# Altium PCB ALCT_MEZ_LX150T.PcbDoc (part 6 of 9)
Units mil, origin at the board's own origin, x right, y up, seen from the top; angles counter-clockwise.
Board outline 4101.98 x 5875.01 mil, 12 copper layers (Top Layer, Mid-Layer 1, +3V3, Mid-Layer 2, +1V2, Mid-Layer 4, +2V5, Mid-Layer 5, GND1, Mid-Layer 7, GND2, Bottom Layer), stack 64.7 mil thick; 378 components, 616 nets, 2492 pads, 1686 vias.
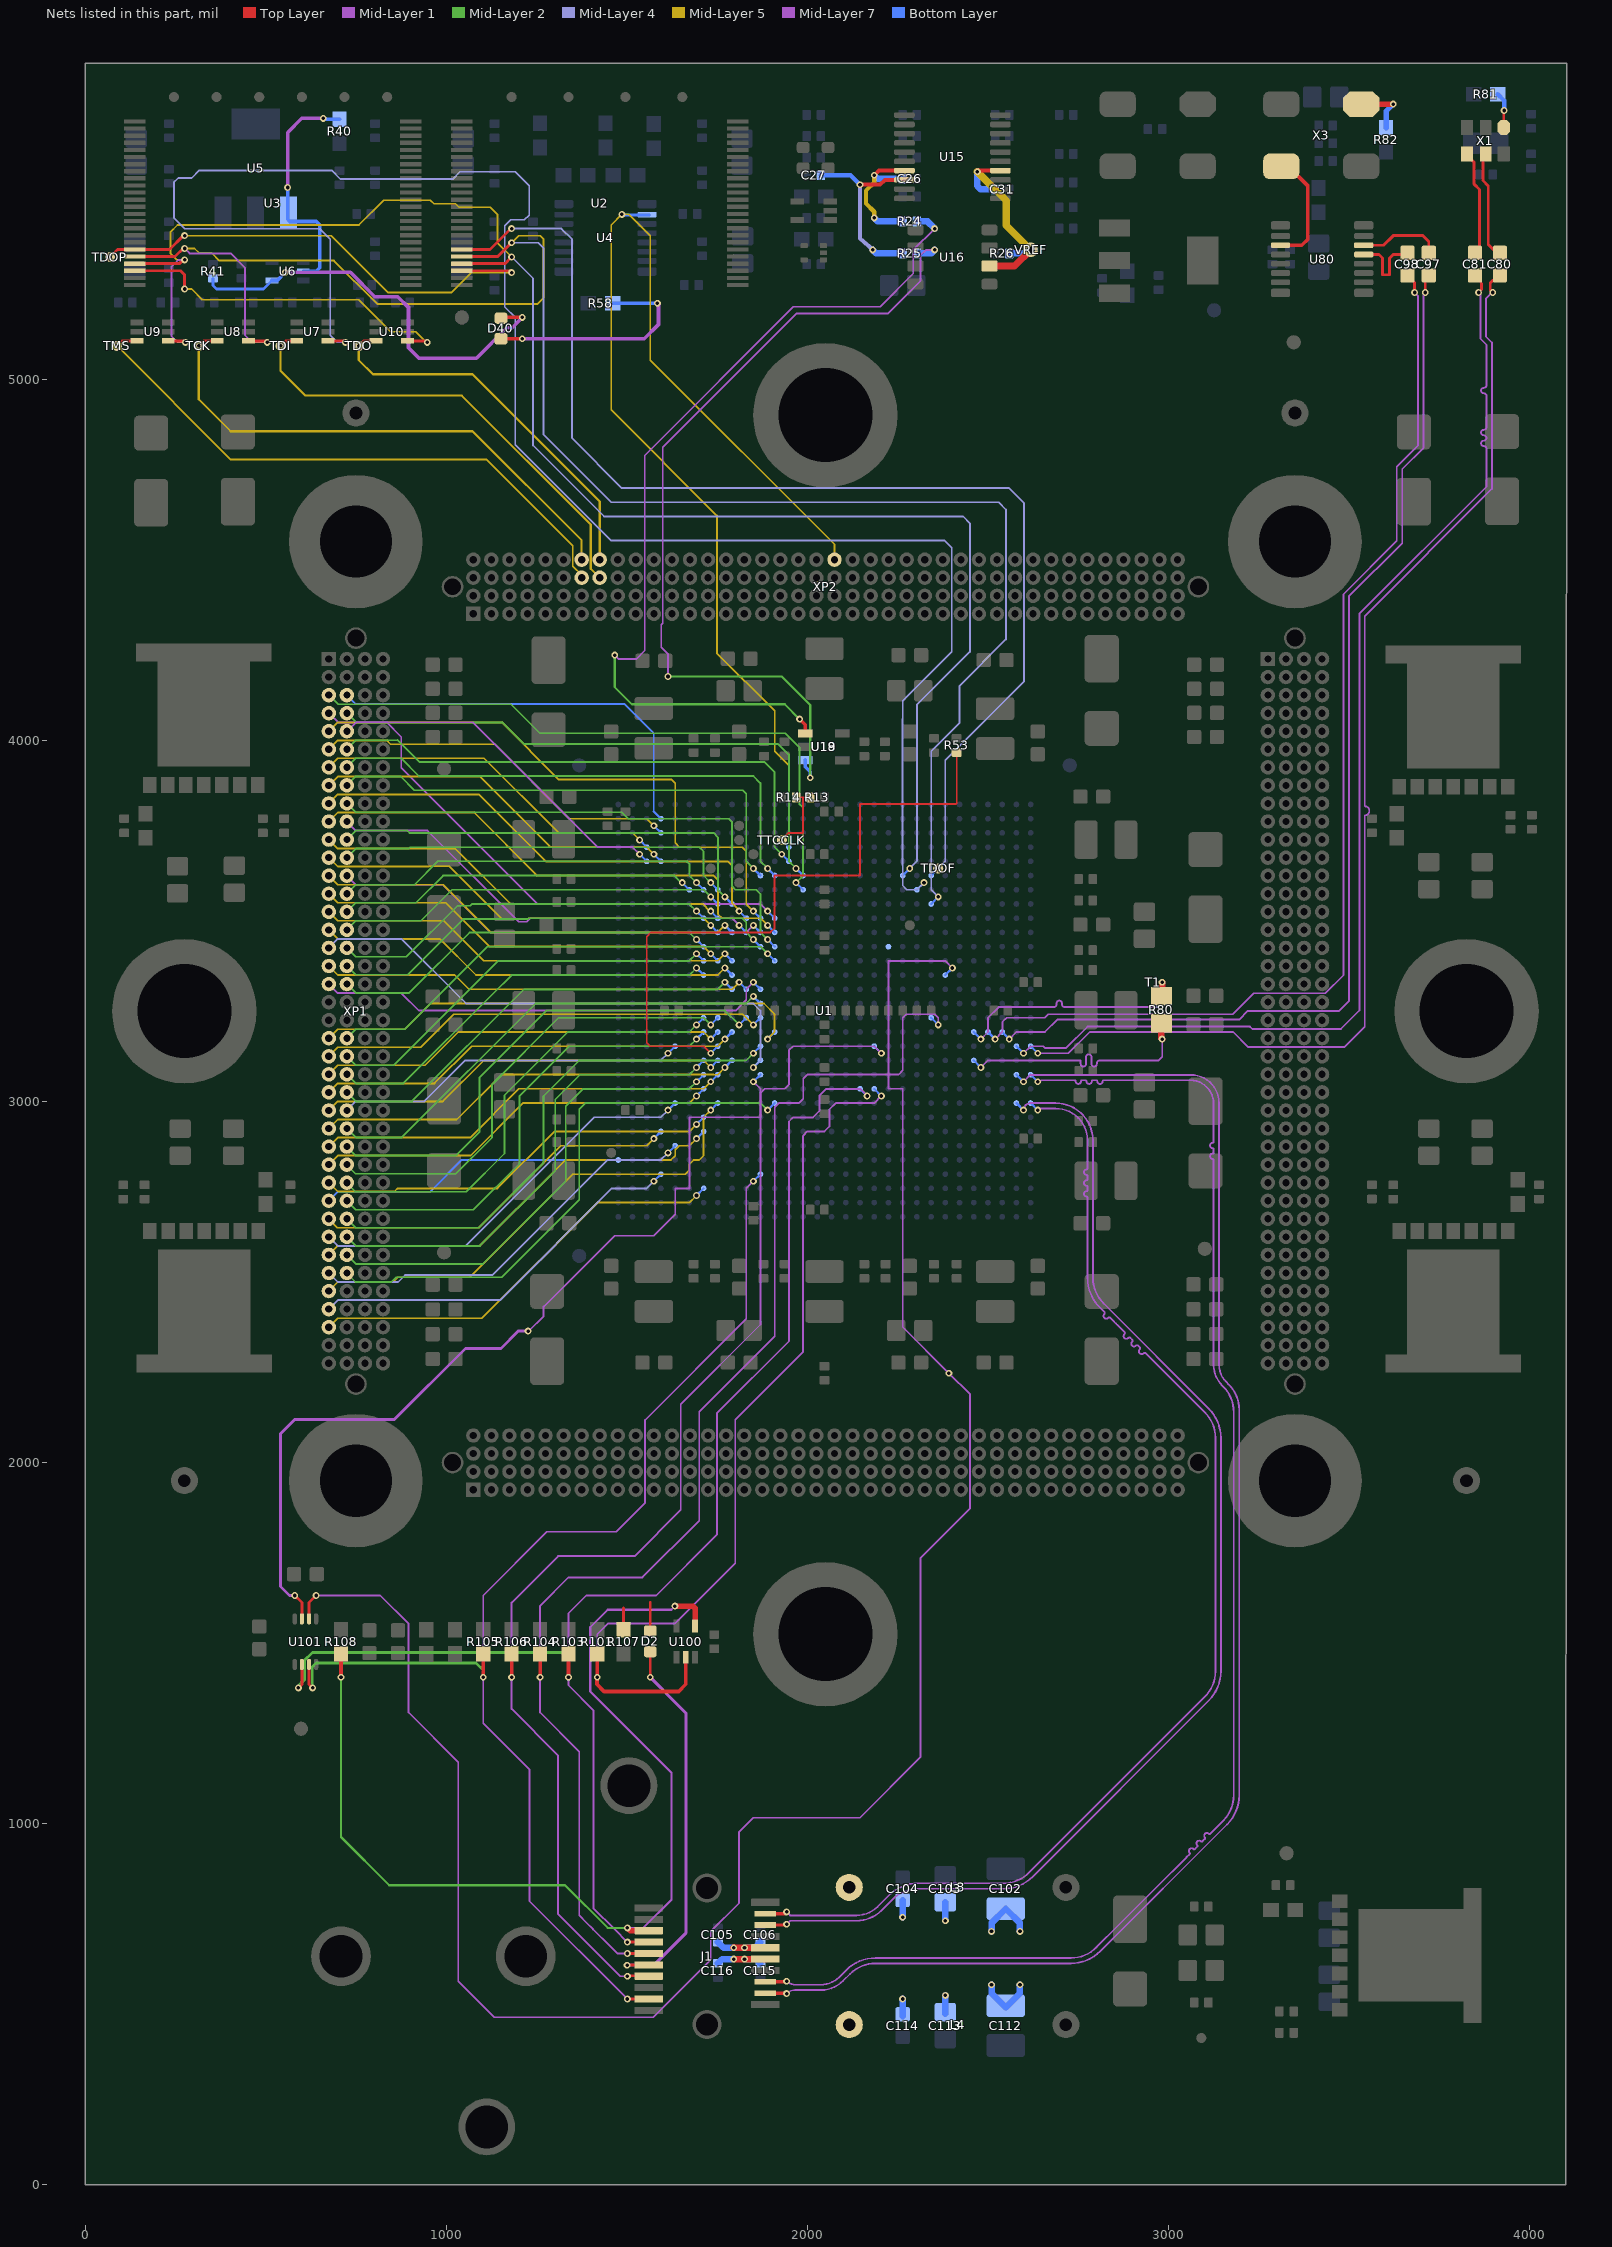
[diagram p15: the nets of this part, all layers, seen from the top]

## Via types
v1: diameter 19, hole 10, Top Layer to Bottom Layer, tented both sides, 1667 vias
v2: diameter 40, hole 20, Top Layer to Bottom Layer, 12 vias
v3: diameter 19, hole 10, Top Layer to Bottom Layer, 7 vias

## Nets (pads, with @x,y where several pads share a name; then routed paths per layer and width w, separated by ;. In a path a pad name is that pad's centre, name@x,y a point inside that pad or via, vN(x,y) a via of type N, cw(c..) or ccw(c..) an arc to the next point about the centre after c; other vN are vias at no path point) (continued)
MEZ_CLOCK: R13.2 R14.1 TTCCLK.1 U1.V27 U4.2 XP2.D21 | length 3475.5
  Top Layer w5: v1(1929.14,3723.82) 1948.82,3743.49 1988.17,3743.49 ; R14.1@1968.5,3841.93 1988.19,3841.93 ; 1988.19,3743.51 1988.19,3841.93 ; R13.2@2007.87,3841.93 1988.19,3841.93
  Mid-Layer 5 w5: v1(1929.14,3723.82) 1948.65,3743.33 1948.65,3930.69 1909.45,3969.89 1909.45,4081.13 1749.5,4241.08 1749.5,4621.96 1456.69,4914.77 1456.69,5426.58 v1(1486.22,5456.11) 1505.91,5456.11 1564.96,5397.05 1564.96,5052.56 2075,4542.53 XP2.D21@2075,4500.01
  Bottom Layer w6: v1(1929.14,3723.82) U1.V27@1948.82,3704.14
  Bottom Layer w8: v1@1488.18,5454.15 U4.2@1562.99,5454.15
mgt_refclk0_n: C80.2 U1.A13 | length 3244
  Top Layer w8: v1(3897.64,5239.57) 3890.61,5246.6 3890.61,5266.01 C80.2@3897.64,5273.04
  Mid-Layer 7 w5: v1(2637.8,3133.27) 2722.75,3133.27 2781.8,3192.33 3179.13,3192.33 3220.96,3150.51 3486.5,3150.51 3543.31,3207.31 3543.31,3768.71 3543.31,3792.13 ccw(c3543.31,3804.63) 3543.31,3817.13 3543.31,3842.13 3543.31,3867.13 3543.31,4343.9 3895.3,4695.89 3895.3,5101.25 3878.72,5117.83 3878.72,5222.99 v1@3895.3,5239.57
  Bottom Layer w6: U1.A13@2618.11,3152.96 v1(2637.8,3133.27)
mgt_refclk0_p: C81.2 U1.B13 | length 3264.7
  Top Layer w5: C81.2@3848.43,5282.88 3866.61,5264.69
  Top Layer w8: v1(3858.27,5239.57) 3866.61,5247.91 3866.61,5264.69
  Mid-Layer 7 w5: v1(2598.42,3133.27) 2618.11,3152.96 2652.8,3152.96 2657.48,3148.27 2716.54,3148.27 2775.59,3207.33 3225.18,3207.33 3232,3200.51 3477.08,3200.51 3528.31,3251.74 3528.31,4350.12 3880.3,4702.1 3880.3,4798.01 3880.3,4799.51 3880.3,4807.01 ccw(c3872.8,4807.01) 3872.8,4814.51 cw(c3872.8,4822.01) 3865.3,4822.01 cw(c3872.8,4822.01) 3872.8,4829.51 ccw(c3872.8,4837.01) 3880.3,4837.01 ccw(c3872.8,4837.01) 3872.8,4844.51 cw(c3872.8,4852.01) 3865.3,4852.01 cw(c3872.8,4852.01) 3872.8,4859.51 ccw(c3872.8,4867.01) 3880.3,4867.01 3880.3,4874.51 3880.3,4889.51 3880.3,4897.01 3880.3,4906.8 3880.3,4921.8 3880.3,4936.8 3880.3,4944.3 3880.3,4945.69 3880.3,4953.19 ccw(c3872.8,4953.19) 3872.8,4960.69 cw(c3872.8,4968.19) 3865.3,4968.19 cw(c3872.8,4968.19) 3872.8,4975.69 ccw(c3872.8,4983.19) 3880.3,4983.19 3880.3,4990.69 3880.3,5005.69 3880.3,5013.19 3880.3,5014.51 3880.3,5029.51 3880.3,5037.01 3880.3,5061.01 3880.3,5095.04 3863.72,5111.62 3863.72,5234.12 v1(3858.27,5239.57)
  Bottom Layer w6: U1.B13@2578.74,3152.96 v1(2598.42,3133.27)
mgt_refclk1_n: C97.2 U1.C14 | length 3112.6
  Top Layer w8: v1(3710.63,5239.57) 3710.63,5276.97 C97.2@3720.47,5286.82
  Mid-Layer 7 w5: v1(2559.05,3172.64) 2578.74,3192.33 2657.48,3192.33 2691.69,3226.54 3195.19,3226.54 3219.15,3250.51 3472.5,3250.51 3499.25,3277.26 3499.25,4398.27 3646.89,4545.91 3646.89,4751.08 3705.94,4810.13 3705.94,5007.01 3705.94,5072.25 3705.94,5108.01 3705.94,5234.89 v1(3710.63,5239.57)
  Bottom Layer w6: U1.C14@2539.37,3192.33 v1(2559.05,3172.64)
mgt_refclk1_p: C98.2 U1.D14 | length 3116.5
  Top Layer w8: C98.2@3661.42,5286.82 3681.1,5267.13 v1(3681.1,5239.57)
  Mid-Layer 7 w5: v1(2519.69,3172.65) 2540.06,3193.03 2540.06,3219.87 2551.89,3231.7 2657.48,3231.7 2667.32,3241.54 3178,3241.54 3235.96,3299.51 3434.15,3299.51 3484.25,3349.61 3484.25,4404.49 3631.89,4552.12 3631.89,4757.29 3690.94,4816.34 3690.94,5229.73 v1(3681.1,5239.57)
  Bottom Layer w6: U1.D14@2500,3192.31 v1@2519.67,3172.64
mgtavttrcal: R80.1 T1.1 U1.E14 | length 714.1
  Top Layer w18: R80.1@2982.28,3292.72 v1(2982.28,3330.12)
  Mid-Layer 7 w5: v1(2480.33,3172.63) 2500,3192.31 2500,3231.7 2529.53,3261.23 2618.11,3261.23 2637.78,3261.23 2645.28,3261.23 2660.28,3261.23 2667.32,3261.23 2674.82,3261.23 2682.32,3261.23 ccw(c2682.32,3268.73) 2689.82,3268.73 2689.82,3271.71 cw(c2697.32,3271.71) 2697.32,3279.21 cw(c2697.32,3271.71) 2704.82,3271.71 2704.82,3268.73 ccw(c2712.32,3268.73) 2712.32,3261.23 2789,3261.23 2974,3261.23 2974,3261.72 2982.28,3270.01 v1(2982.28,3330.12)
  Bottom Layer w6: U1.E14@2460.64,3192.32 v1(2480.33,3172.63)
mgtrref: R80.2 U1.E12 | length 728.5
  Top Layer w18: R80.2@2980.32,3215.95 2980.32,3174.61 v1(2982.28,3172.64)
  Mid-Layer 7 w5: v1(2480.33,3093.9) 2500.02,3113.59 2755,3113.59 cw(c2755,3112.09) 2756.5,3112.09 2756.5,3104.06 ccw(c2764,3104.06) 2764,3096.56 ccw(c2764,3104.06) 2771.5,3104.06 2771.5,3113.59 2771.5,3123.11 cw(c2779,3123.11) 2779,3130.61 cw(c2779,3123.11) 2786.5,3123.11 2786.5,3113.59 2786.5,3104.06 ccw(c2794,3104.06) 2794,3096.56 ccw(c2794,3104.06) 2801.5,3104.06 2801.5,3106.09 cw(c2809,3106.09) 2809,3113.59 2864.17,3113.59 ; 2850,3113.59 2864.17,3113.59 ; v1(2982.28,3172.64) 2982.28,3123.43 2972.44,3113.59 2864.17,3113.59
  Bottom Layer w6: U1.E12@2460.63,3113.59 v1(2480.33,3093.9)
mod_abs: D2.K J1.6 | length 1081.1
  Top Layer w8: v1(1500.98,608.47) 1501.97,609.45 J1.6@1559.45,609.45 ; J1.6@1560.63,609.45 J1.6@1559.45,609.45 ; J1.6@1560.63,610.64 J1.6@1559.45,609.45 ; v1(1564.96,1405.56) D2.K@1564.96,1476.58
  Mid-Layer 7 w8: v1(1500.98,608.47) 1574.8,608.47 1663.39,697.05 1663.39,1307.13 v1(1564.96,1405.56)
NetD2_A: D2.A R107.2 | length 138.8
  Top Layer w8: R107.2@1491.14,1537.6 1491.14,1597.64 ; D2.A@1564.96,1533.67 1564.96,1612.41
NetJ1_3: J1.3 R108.2 U100.4 | length 2833.9
  Top Layer w12: v1@708.66,1405.71 R108.2@708.66,1470.68
  Top Layer w15: v1(1501.58,711.82) 1509.45,703.94 J1.3@1560.63,703.94 ; v1@1633.86,1602.56 1683.07,1602.56 1688.98,1596.66 U100.4@1688.98,1547.45
  Mid-Layer 2 w6: v1(708.66,1405.56) 708.66,963.59 842.32,829.93 1328.74,829.93 1446.85,711.82 v1(1501.58,711.82)
  Mid-Layer 7 w6: v1(1501.58,711.82) 1545.28,711.82 1624.02,790.56 1624.02,1140.75 1398.61,1366.16 1398.61,1544.09 1447.24,1592.72 1623.23,1592.72 v1(1633.07,1602.56)
osc0_n: C80.1 X1.5 | length 309
  Top Layer w4: X1.5@3868.11,5610.74 3868.11,5613.59 X1.5@3877.95,5623.43
  Top Layer w8: X1.5@3870.18,5610.74 3870.18,5549.61 3885.19,5534.61 3885.19,5451.19 ; 3885.19,5456.11 3885.19,5451.19 ; 3890.11,5367.53 3885.19,5372.45 ; C80.1@3907.48,5345.87 3907.48,5350.16 3885.19,5372.45 ; 3885.19,5372.45 3885.19,5451.19
osc0_p: C81.1 X1.4 | length 312.1
  Top Layer w4: C81.1@3848.43,5345.87 C81.1@3858.27,5355.71
  Top Layer w8: X1.4@3826.38,5623.43 3826.38,5619.5 3846.18,5599.7 3846.18,5539.67 3861.19,5524.66 3861.19,5437.38 ; C81.1@3858.27,5355.71 C81.1@3861.19,5358.64 ; C81.1@3861.19,5362.51 3861.19,5437.38 ; 3861.19,5456.11 3861.19,5437.38
osc80_lvcmos: U80.3 X3.3 | length 326.6
  Top Layer w10: U80.3@3310.04,5370.48 3369.09,5370.48 3385.83,5387.21 3385.83,5534.85 3331.69,5588.98 X3.3@3312.01,5588.98
osc80_n: C98.1 U80.13 | length 223.8
  Top Layer w8: U80.13@3540.35,5344.89 3582.68,5344.89 3592.52,5335.04 3592.52,5288.79 3612.2,5288.79 3612.2,5335.04 3622.05,5344.89 3656.5,5344.89 C98.1@3661.42,5349.81
osc80_p: C97.1 U80.14 | length 229.1
  Top Layer w8: U80.14@3540.35,5370.48 3595.47,5370.48 3622.05,5397.05 3704.72,5397.05 3720.47,5381.3 C97.1@3720.47,5349.81
POR: R40.2 U5.2 U6.2 | length 663.6
  Mid-Layer 7 w10: v1(561.02,5530.52) 561.02,5682.48 600.39,5721.86 v1(659.45,5721.86)
  Bottom Layer w10: v1(561.02,5530.52) 561.02,5442.33 566.93,5436.42 639.76,5436.42 649.61,5426.58 649.61,5308.47 639.76,5298.63 U6.2@604.33,5298.63 ; v1(659.45,5721.86) 661.42,5719.89 R40.2@704.72,5719.89
POR_A: D40.A R58.2 | length 637
  Top Layer w10: D40.A@1151.57,5111.62 v1(1210.63,5111.61)
  Mid-Layer 1 w10: v1(1210.63,5111.61) 1548.48,5111.61 1587.86,5150.99 1587.86,5206.82 v3(1584.64,5210.04)
  Bottom Layer w10: R58.2@1460.63,5210.05 v3(1584.64,5210.04)
POR_K: D40.K R41.1 U6.4 | length 1173.7
  Top Layer w10: D40.K@1151.57,5168.71 1153.53,5170.67 v1(1210.62,5170.66)
  Mid-Layer 1 w10: v3@551.18,5298.63 v3(554.42,5295.39) 734.7,5295.39 802.33,5227.76 866.14,5227.76 895.67,5198.23 895.67,5086.94 924.54,5058.08 1083.58,5058.08 1167.99,5142.48 1182.45,5142.48 v1(1210.62,5170.66)
  Bottom Layer w8: R41.1@354.33,5278.94 354.33,5259.26 364.17,5249.41 494.09,5249.41 U6.4@517.72,5273.04
  Bottom Layer w10: U6.4@517.72,5273.04 532.07,5273.04 v3(554.42,5295.39)
RDWR_B: R53.1 U1.AC13 | length 1858.3
  Top Layer w5: v1(1732.29,3133.27) 1712.6,3152.96 1564.96,3152.96 1555.12,3162.8 1555.12,3456.13 1566.91,3467.92 1897.67,3467.92 1908.64,3478.89 1908.64,3625.4 2145.67,3625.4 2145.67,3823.63 2411.42,3823.63 2413.39,3825.6 R53.1@2413.39,3960.04
  Bottom Layer w6: v1(1732.29,3133.27) U1.AC13@1751.98,3152.95
sda1_3v3: U1.Y11 U101.7 | length 2544.6
  Top Layer w8: v1(580.71,1632.09) 600.39,1612.41 U101.7@600.39,1567.13
  Mid-Layer 1 w5: v3@1227.66,2362.9 1269.68,2404.93 1269.68,2431.8 1466.04,2628.15 1574.8,2628.15 1633.86,2687.2 1633.86,2759.26 1673.23,2759.26 1673.23,2956.11 1870.08,2956.11 1870.08,3034.85 v1(1850.39,3054.54)
  Mid-Layer 7 w8: v1(580.71,1632.09) 566.14,1632.09 541.34,1656.9 541.34,1701.78 541.34,2080.12 580.71,2119.49 856.3,2119.49 1053.15,2316.34 1151.57,2316.34 1199.19,2363.96 v3(1226.6,2363.96)
  Bottom Layer w6: v1(1850.39,3054.54) U1.Y11@1870.07,3074.23
sda2_3v3: U1.G18 U101.6 | length 5779.1
  Top Layer w8: U101.6@620.08,1567.13 620.08,1612.41 v1(639.76,1632.09)
  Mid-Layer 1 w5: v1(2391.73,2247.45) 2263.78,2375.4 2263.78,3034.85 2224.41,3034.85 2224.41,3388.48 2382.58,3388.48 v1(2401.58,3369.48)
  Mid-Layer 7 w5: v1(639.76,1632.09) 816.93,1632.09 895.67,1553.35 895.67,1308.08 1033.46,1170.28 1033.46,564.18 1133.17,464.47 1573.52,464.47 1732.28,623.23 1732.28,701.97 1811.02,780.71 1811.02,977.56 1850.39,1016.93 2145.67,1016.93 2312.99,1184.26 2312.99,1735.64 2450.5,1873.14 2450.5,2188.68 v1(2391.73,2247.45)
  Bottom Layer w6: U1.G18@2381.89,3349.81 v1(2401.58,3369.48)
sfp_disable: R101.2 U1.M10 U100.2 | length 2574.2
  Top Layer w10: R101.2@1418.11,1460.67 v1(1418.11,1405.56) 1417.32,1404.77 1417.32,1386.03 1437.01,1366.34 1643.7,1366.34 1663.39,1386.03 U100.2@1663.39,1460.83
  Mid-Layer 7 w5: v1(1418.11,1405.56) 1418.11,1525.01 1447.24,1554.14 1633.07,1554.14 1800.5,1721.57 1800.5,2118.81 1988.19,2306.5 1988.19,2904.94 2000.17,2916.92 2047.42,2916.92 2061.23,2930.72 2061.23,2977.96 2078.56,2995.29 2184.87,2995.29 v1(2204.73,3015.15)
  Bottom Layer w6: U1.M10@2185.04,3034.85 v1(2204.73,3015.15)
sfp_i2c_scl: J1.5 R104.2 U1.H15 | length 3718.4
  Top Layer w8: v1(1501.57,640.95) 1559.45,640.95 J1.5@1560.63,642.13
  Top Layer w10: v1(1259.84,1405.56) R104.2@1259.84,1460.67
  Mid-Layer 7 w5: 1406.69,707.68 1387.8,726.58 ; v1(1501.57,640.95) 1473.43,640.95 1387.8,726.58 ; v1(2362.21,3212) 2362.21,3231.69 2352.36,3241.54 2273.62,3241.54 2263.98,3231.9 2263.98,3086.21 2252.17,3074.4 2000.17,3074.4 1988.38,3062.61 1988.38,3007.44 1976.22,2995.28 1921.07,2995.28 1909.45,2983.67 1909.45,2349.79 1700.5,2140.84 1700.5,1839.57 1543.02,1682.09 1338.58,1682.09 1259.84,1603.35 1259.84,1582.88 v1(1259.84,1405.56) 1259.84,1308.08 1368.11,1199.81 1368.11,746.27 1387.8,726.58
  Bottom Layer w6: U1.H15@2342.52,3231.7 v1(2362.21,3212)
sfp_i2c_scl2: J1.7 R106.2 U1.M13 | length 3594.5
  Top Layer w8: v1(1501.57,577.96) 1502.76,579.14 1560.63,579.14 J1.7@1559.45,577.96
  Top Layer w10: v1(1181.1,1405.56) R106.2@1181.1,1460.67
  Mid-Layer 7 w5: v1(1501.57,577.96) 1482.28,577.96 1309.06,751.19 1309.06,1189.97 1181.1,1317.92 v1(1181.1,1405.56) 1181.1,1612.41 1309.84,1741.15 1521.55,1741.15 1649.5,1869.1 1649.5,2161.69 1870.08,2382.27 1870.08,3023.03 1881.9,3034.85 1937.04,3034.85 1948.82,3046.63 1948.82,3141.15 1960.43,3152.77 2185.23,3152.77 v1(2204.73,3133.27)
  Bottom Layer w6: U1.M13@2185.04,3152.96 v1(2204.73,3133.27)
sfp_i2c_sda: J1.4 R103.2 U1.N10 U101.2 | length 4123.5
  Top Layer w8: v1(590.55,1376.19) 600.39,1386.03 U101.2@600.39,1441.15 ; v1(1501.57,672.45) J1.4@1560.63,672.45
  Top Layer w10: v1(1338.58,1405.56) R103.2@1338.58,1460.67
  Mid-Layer 2 w8: v1@592.43,1384.15 607.11,1398.82 607.11,1451.8 629.92,1474.61 1318.9,1474.61 1338.58,1454.93 v1(1338.58,1405.56)
  Mid-Layer 7 w5: 1338.58,1525.01 1338.58,1573.04 ; v1(1501.57,672.45) 1466.54,707.49 1407.48,766.54 1407.48,1314.58 1338.58,1383.47 v1(1338.58,1405.56) 1338.58,1573.04 ; v1(2165.36,3015.15) 2145.86,3034.65 2052.17,3034.65 2033.17,3015.65 2033.17,2973.49 2015.59,2955.92 1960.43,2955.92 1949,2944.5 1949,2336.21 1749.5,2136.71 1749.5,1800.2 1581.39,1632.09 1387.8,1632.09 1338.58,1582.88 1338.58,1573.04
  Bottom Layer w6: U1.N10@2145.68,3034.83 v1(2165.36,3015.15)
sfp_i2c_sda2: J1.9 R105.2 U1.Y4 U101.3 | length 3671.7
  Top Layer w8: U101.3@620.08,1441.15 620.08,1386.03 v1(629.92,1376.19) ; v1(1501.57,514.97) J1.9@1560.63,514.97
  Top Layer w10: v1(1102.36,1405.56) R105.2@1102.36,1460.67
  Mid-Layer 1 w15: v1@1499.84,514.97 v1(1501.57,514.97)
  Mid-Layer 2 w8: v1(629.92,1376.19) 629.11,1377 629.11,1434.43 639.76,1445.08 1082.68,1445.08 1102.36,1425.4 v1(1102.36,1405.56)
  Mid-Layer 7 w5: 1230.32,904.53 1230.32,947.88 ; v1(1501.57,514.97) 1230.32,786.23 1230.32,947.88 ; v1(1850.39,2778.93) 1830.89,2759.43 1830.89,2398.24 1550.5,2117.85 1550.5,1888.79 1470.29,1808.58 1278.85,1808.58 1102.36,1632.09 v1(1102.36,1405.56) 1102.36,1278.55 1230.32,1150.6 1230.32,947.88
  Bottom Layer w6: v1(1850.39,2778.93) U1.Y4@1870.08,2798.62
sfp_tx2_n: J1.13 U1.A11 | length 4131.4
  Top Layer w10: J1.13@1883.46,562.21 v1@1935.33,562.21
  Mid-Layer 7 w5: v1(1942.52,564.18) ccw(c1966,587.66) 1966,554.45 2037.4,554.45 ccw(c2037.4,626.03) 2088.01,575.42 2107.3,594.71 cw(c2188.62,513.39) 2188.62,628.39 2273.62,628.39 ; 2263.78,628.39 2273.62,628.39 ; 2574.61,628.39 2549.21,628.39 ; v1(2637.8,3054.53) 2644,3054.53 2648,3058.53 2720,3058.53 2727.5,3058.53 2740,3058.53 cw(c2740,3056.03) 2742.5,3056.03 ccw(c2750,3056.03) 2750,3048.53 ccw(c2750,3056.03) 2757.5,3056.03 cw(c2760,3056.03) 2760,3058.53 2770,3058.53 cw(c2770,3056.03) 2772.5,3056.03 ccw(c2780,3056.03) 2780,3048.53 ccw(c2780,3056.03) 2787.5,3056.03 cw(c2790,3056.03) 2790,3058.53 2800,3058.53 cw(c2800,3056.03) 2802.5,3056.03 ccw(c2810,3056.03) 2810,3048.53 ccw(c2810,3056.03) 2817.5,3056.03 cw(c2820,3056.03) 2820,3058.53 2831,3058.53 3060.59,3058.53 cw(c3060.59,2994.36) 3105.97,3039.74 cw(c3060.59,2994.36) 3124.76,2994.36 ; 3124.76,2268.05 3124.76,2798.63 3124.76,2831.01 3124.76,2838.01 ccw(c3122.26,2838.01) 3122.26,2840.51 cw(c3122.26,2848.01) 3114.76,2848.01 cw(c3122.26,2848.01) 3122.26,2855.51 ccw(c3122.26,2858.01) 3124.76,2858.01 3124.76,2868.01 ccw(c3122.26,2868.01) 3122.26,2870.51 cw(c3122.26,2878.01) 3114.76,2878.01 cw(c3122.26,2878.01) 3122.26,2885.51 ccw(c3122.26,2888.01) 3124.76,2888.01 3124.76,2900.51 3124.76,2908.01 3124.76,2936.42 3124.76,2995.48 ; 3124.76,2270.95 ccw(c3206.97,2270.95) 3148.84,2212.82 3151.22,2210.45 ; 3151.22,2210.45 cw(c3080.51,2139.74) 3180.51,2139.74 3180.51,1079.41 cw(c3080.51,1079.41) 3151.22,1008.7 3129,986.49 3123.7,981.18 3114.86,972.34 cw(c3113.09,974.11) 3111.32,972.34 ccw(c3106.02,967.04) 3100.72,972.34 ccw(c3106.02,967.04) 3100.72,961.74 cw(c3098.95,959.97) 3100.72,958.2 3093.64,951.13 cw(c3091.88,952.9) 3090.11,951.13 ccw(c3084.81,945.83) 3079.5,951.13 ccw(c3084.81,945.83) 3079.5,940.52 cw(c3077.73,938.76) 3079.5,936.99 3072.43,929.92 cw(c3070.66,931.69) 3068.9,929.92 ccw(c3063.59,924.61) 3058.29,929.92 ccw(c3063.59,924.61) 3058.29,919.31 cw(c3056.52,917.54) 3058.29,915.78 3049.45,906.94 3048.76,906.25 2967.52,825.01 2860.04,717.53 2800.2,657.68 cw(c2729.48,728.39) 2729.48,628.39 2549.21,628.39 ; 2273.62,628.39 2549.21,628.39
  Bottom Layer w6: U1.A11@2618.11,3074.22 v1(2637.8,3054.53)
sfp_tx2_p: J1.12 U1.B11 | length 4105.2
  Top Layer w10: J1.12@1883.46,530.71 1941.53,530.71 v1(1942.52,529.73)
  Mid-Layer 7 w5: v1(1942.52,529.73) cw(c1966,506.25) 1945.27,532.19 cw(c1966,506.25) 1966,539.45 2037.4,539.45 ccw(c2037.4,626.03) 2098.62,564.81 2117.91,584.1 cw(c2188.62,513.39) 2188.62,613.39 2729.48,613.39 ccw(c2729.48,728.39) 2810.8,647.07 3161.82,998.1 ccw(c3080.51,1079.41) 3195.51,1079.41 3195.51,2146.71 ccw(c3097.34,2146.71) 3166.75,2216.13 3159.45,2223.43 cw(c3206.97,2270.95) 3139.76,2270.95 ; v1(2598.43,3054.53) 2617.43,3073.53 3061.71,3073.53 cw(c3061.71,2995.48) 3139.76,2995.48 3139.76,2936.42 3139.76,2926.42 3139.76,2906.42 3139.76,2806.42 3139.76,2798.63 3139.76,2268.05
  Bottom Layer w6: U1.B11@2578.74,3074.22 v1(2598.43,3054.53)
SFP_TX_N: J1.19 U1.A9 | length 3476.3
  Top Layer w10: J1.19@1883.46,751.19 v1@1937.6,751.19
  Mid-Layer 7 w5: v1(1942.52,756.11) 1952.24,746.38 1978.35,746.38 ; 1968.5,746.38 1978.35,746.38 ; 2116.11,746.38 2096.46,746.38 ; v1(2637.8,2975.79) 2642.48,2980.48 2687.01,2980.48 cw(c2687.01,2891.9) 2775.59,2891.9 2775.59,2877.37 2775.59,2834.01 2775.59,2826.51 2775.59,2814.01 cw(c2773.09,2814.01) 2773.09,2811.51 ccw(c2773.09,2804.01) 2765.59,2804.01 ccw(c2773.09,2804.01) 2773.09,2796.51 cw(c2773.09,2794.01) 2775.59,2794.01 2775.59,2784.01 cw(c2773.09,2784.01) 2773.09,2781.51 ccw(c2773.09,2774.01) 2765.59,2774.01 ccw(c2773.09,2774.01) 2773.09,2766.51 cw(c2773.09,2764.01) 2775.59,2764.01 2775.59,2754.01 cw(c2773.09,2754.01) 2773.09,2751.51 ccw(c2773.09,2744.01) 2765.59,2744.01 ccw(c2773.09,2744.01) 2773.09,2736.51 cw(c2773.09,2734.01) 2775.59,2734.01 2775.59,2724.01 2775.59,2513.19 2775.59,2511.62 ccw(c2890.59,2511.62) 2809.27,2430.3 2814.58,2425 2822,2417.57 cw(c2818.82,2414.39) 2822,2411.21 ccw(c2827.3,2405.9) 2822,2400.6 ccw(c2827.3,2405.9) 2832.61,2400.6 cw(c2835.79,2397.42) 2838.97,2400.6 2846.4,2393.18 2854.33,2385.24 2859.63,2379.94 2870.24,2369.33 2877.67,2361.91 cw(c2874.48,2358.73) 2877.67,2355.54 ccw(c2882.97,2350.24) 2877.67,2344.94 ccw(c2882.97,2350.24) 2888.27,2344.94 cw(c2891.45,2341.75) 2894.64,2344.94 2898.88,2340.69 cw(c2895.7,2337.51) 2898.88,2334.33 ccw(c2904.18,2329.03) 2898.88,2323.72 ccw(c2904.18,2329.03) 2909.49,2323.72 cw(c2912.67,2320.54) 2915.85,2323.72 2920.09,2319.48 cw(c2916.91,2316.3) 2920.09,2313.12 ccw(c2925.39,2307.81) 2920.09,2302.51 ccw(c2925.39,2307.81) 2930.7,2302.51 cw(c2933.88,2299.33) 2937.06,2302.51 2937.28,2302.29 3070.87,2168.71 3100.63,2138.94 cw(c3029.92,2068.23) 3129.92,2068.23 3129.92,1678.63 3129.92,1422.53 cw(c3029.92,1422.53) 3100.63,1351.82 2613.19,864.37 cw(c2542.48,935.08) 2542.48,835.08 2306.73,835.08 ccw(c2306.73,720.08) 2225.41,801.4 2194.88,770.87 cw(c2135.76,829.99) 2135.76,746.38 2096.46,746.38 ; 1978.35,746.38 2096.46,746.38
  Bottom Layer w6: U1.A9@2618.11,2995.48 v1(2637.8,2975.79)
SFP_TX_P: J1.18 U1.B9 | length 3459.3
  Top Layer w8: J1.18@1883.46,719.69 1937.2,719.69 v1@1938.39,720.87
  Top Layer w14: v1@1938.39,720.87 1939.17,721.66 v1(1942.52,721.66)
  Mid-Layer 7 w5: v1(1942.52,721.66) 1952.24,731.38 2135.76,731.38 ccw(c2135.76,829.99) 2205.49,760.27 2236.02,790.79 cw(c2306.73,720.08) 2306.73,820.08 2542.48,820.08 ccw(c2542.48,935.08) 2623.79,853.77 3111.24,1341.21 ccw(c3029.92,1422.53) 3144.92,1422.53 3144.92,1678.63 3144.92,2068.23 ccw(c3029.92,2068.23) 3111.24,2149.55 2819.88,2440.91 cw(c2890.59,2511.62) 2790.59,2511.62 2790.59,2891.9 ccw(c2687.01,2891.9) 2687.01,2995.48 2618.11,2995.48 ccw(c2618.11,2975.79) v1(2598.43,2975.79)
  Bottom Layer w6: U1.B9@2578.74,2995.48 v1(2598.43,2975.79)
sfp_vcct: C102.1 C103.1 C104.1 C105.1 C106.1 J1.16 L3.1 | length 449.6
  Top Layer w10: J1.16@1882.48,657.68 J1.16@1883.46,656.7
  Top Layer w18: v1@1796.26,657.68 1795.28,656.7 J1.16@1883.46,656.7
  Bottom Layer w18: C105.1@1751.97,672.45 1767.72,656.7 v1(1796.26,656.7) ; v1(1825.79,656.7) 1854.33,656.7 C106.1@1870.08,672.45 ; v1(2263.78,741.34) C104.1@2263.78,788.59 ; v1(2381.89,731.5) C103.1@2381.89,782.68 ; v1(2509.84,701.97) 2509.84,725.6 C102.1@2549.21,764.97 2588.58,725.6 v1(2588.58,701.97)
sfp_vcct2: C112.1 C113.1 C114.1 C115.1 C116.1 J1.15 L4.1 | length 445.4
  Top Layer w10: v1@1825.79,623.23 v1@1827.76,625.2
  Top Layer w18: v1(1796.26,625.2) 1827.76,625.2 J1.15@1883.46,625.2
  Bottom Layer w18: C116.1@1751.97,613.39 1763.78,625.2 v1(1796.26,625.2) ; v1(1825.79,625.2) 1858.27,625.2 C115.1@1870.08,613.39 ; C114.1@2263.78,467.72 C114.1@2263.78,472.64 v1(2263.78,514.97) ; C113.1@2381.89,473.63 C113.1@2381.89,478.55 v1(2381.89,524.81) ; v1(2509.84,554.34) 2509.84,530.71 2549.21,491.34 2588.58,530.71 v1(2588.58,554.34)
TCK_2V5: U1.H23 U2.20 U3.20 U8.4 | length 5286
  Top Layer w8: U3.20@137.8,5339.18 249.21,5339.18 v1@271.65,5361.62 ; U8.4@459.32,5105.71 500.66,5105.71 v1(504.59,5101.78) ; U2.20@1043.31,5339.18 1142.91,5339.18 v1(1181.1,5377.37)
  Mid-Layer 1 w5: v1(275.59,5361.62) 289.37,5347.84 403.54,5347.84 442.91,5308.47 442.91,5121.46 462.6,5101.78 v1@501.97,5101.78
  Mid-Layer 4 w5: v1(1181.1,5377.37) 1254.92,5377.37 1269.68,5362.6 1269.68,4845.87 1456.69,4658.86 2529.53,4658.86 2549.5,4638.89 2549.5,4279.25 2421.26,4151.01 2421.26,4048.63 2342.7,3970.07 2342.7,3755.12 2342.7,3585.84 v1(2362.21,3566.33)
  Mid-Layer 5 w5: v1(275.59,5361.62) 303.13,5361.62 315.63,5349.12 350.39,5349.12 371.54,5327.97 689.16,5327.97 808.87,5208.26 1253.14,5208.26 1269.68,5224.81 1269.68,5387.21 1259.84,5397.05 1200.79,5397.05 v1(1181.1,5377.37)
  Bottom Layer w6: U1.H23@2342.52,3546.66 v1(2362.21,3566.33)
TCK_Pr: TCK.1 U8.3 XP2.D7 | length 1480
  Top Layer w8: v1(314.96,5091.93) 328.74,5105.71 U8.3@366.14,5105.71
  Mid-Layer 5 w6: v1(314.96,5091.93) 314.96,4944.3 403.54,4855.71 1072.83,4855.71 1375,4553.55 XP2.D7@1375,4500.01
TDI_2V5: U1.J24 U7.4 | length 5148.1
  Top Layer w8: U7.4@675.85,5105.71 717.19,5105.71 v1(721.13,5101.78)
  Mid-Layer 4 w5: v1(721.13,5101.78) 698.82,5101.78 679.13,5121.46 679.13,5387.21 650.29,5416.05 276.28,5416.05 246.06,5446.27 246.06,5544.69 258.12,5556.75 295.28,5556.75 316.39,5577.86 683.06,5577.86 707.26,5553.66 1017.5,5553.66 1038.06,5574.22 1190.94,5574.22 1229.63,5535.53 1229.63,5454.07 1216.55,5440.99 1178.4,5440.99 1162.04,5424.63 1162.04,5199.58 1190.94,5170.67 1190.94,4818.21 1455.91,4553.25 2379.24,4553.25 2399.5,4532.99 2399.5,4245.35 2263.78,4109.63 2263.78,4058.47 ; 2263.78,3654.93 2263.78,3597.82 2275.39,3586.21 2303.36,3586.21 v1(2322.84,3605.7)
  Mid-Layer 4 w5.12: 2263.78,3654.93 2263.78,4058.47
  Bottom Layer w6: U1.J24@2303.16,3586.02 v1(2322.84,3605.7)
TDI_PR: TDI.1 U7.3 XP2.C8 | length 1312
  Top Layer w8: v1(541.34,5091.93) 555.12,5105.71 U7.3@585.96,5105.71
  Mid-Layer 5 w6: v1(541.34,5091.93) 541.34,5023.04 610.24,4954.14 1043.31,4954.14 1400,4597.45 1400,4475.01 XP2.C8@1425,4450.01
TDO_2V5: U3.22 U10.4 | length 959.1
  Top Layer w8: U3.22@137.8,5299.81 264.57,5299.81 275.59,5288.79 v1(275.59,5249.41) ; U10.4@902.23,5105.71 943.57,5105.71 v1(947.51,5101.78)
  Mid-Layer 5 w5: v1(275.59,5249.41) 295.28,5249.41 324.8,5219.89 757.87,5219.89 846.46,5131.3 915.35,5131.3 v1@944.88,5101.78
TDO_FPGA: TDOF.1 U1.H25 U2.19 | length 3357.1
  Top Layer w8: U2.19@1043.31,5358.86 1121.26,5358.86 v1@1181.1,5418.71
  Mid-Layer 4 w5: 1348.43,4836.03 1486.22,4698.23 2559.06,4698.23 2599.5,4657.79 2599.5,4161.89 2381.89,3944.28 2381.89,3664.75 v1(2362.21,3645.07)
  Mid-Layer 4 w5.12: v1(1181.1,5416.74) 1318.9,5416.74 1348.43,5387.21 1348.43,4836.03
  Bottom Layer w6: U1.H25@2342.52,3625.4 v1(2362.21,3645.07)
TDO_PR: TDO.1 U10.3 XP2.D8 | length 1089.9
  Top Layer w8: v1(757.87,5091.93) 771.65,5105.71 U10.3@805.77,5105.71 U10.3@812.34,5105.71
  Mid-Layer 5 w6: v1(757.87,5091.93) 757.87,5052.56 797.24,5013.19 1072.83,5013.19 1425,4661.03 XP2.D8@1425,4500.01
TDO_PROM0: TDOP.1 U2.22 U3.19 | length 1360.7
  Top Layer w8: v1(68.9,5338) 89.76,5358.86 U3.19@137.8,5358.86 233.46,5358.86 v1@271.65,5397.05 ; U2.22@1043.31,5299.81 1175.98,5299.81 v1(1181.1,5294.69)
  Mid-Layer 5 w5: v1(275.59,5397.05) 681.8,5397.05 839.28,5239.57 1013.78,5239.57 1068.9,5294.69 v1(1181.1,5294.69)
TMS_2V5: U1.K25 U2.21 U3.21 U9.4 | length 4709.1
  Top Layer w8: U3.21@137.8,5319.49 261.02,5319.49 v1@271.65,5330.12 ; U9.4@232.94,5105.71 274.28,5105.71 v1(278.22,5101.78) ; U2.21@1043.31,5319.49 1162.6,5319.49 v1(1181.1,5338)
  Mid-Layer 1 w5: v1(275.59,5330.12) 258.77,5330.12 238.99,5310.34 238.99,5119.33 256.54,5101.78 v1(278.22,5101.78)
  Mid-Layer 4 w5: v1(1181.1,5338) 1240.16,5278.94 1240.16,4816.34 1437.01,4619.49 2431.1,4619.49 2450,4600.6 2450,4244.69 2303.15,4097.84 2303.15,3664.74 v1(2283.48,3645.07)
  Mid-Layer 5 w5: v1(275.59,5330.12) 253.94,5330.12 236.22,5347.84 236.22,5406.9 255.91,5426.58 758.27,5426.58 826.98,5495.29 956.3,5495.29 966.14,5485.45 1025.76,5485.45 1035.41,5475.79 1122.05,5475.79 1141.75,5456.09 1141.75,5377.37 v1(1181.1,5338)
  Bottom Layer w6: U1.K25@2263.78,3625.4 v1(2283.48,3645.07)
TMS_Pr: TMS.1 U9.3 XP2.C7 | length 1653.4
  Top Layer w8: v1(88.58,5091.93) 102.36,5105.71 U9.3@143.7,5105.71 U9.3@146.33,5105.71
  Mid-Layer 5 w5: v1(88.58,5091.93) 403.54,4776.97 1112.2,4776.97 1350.5,4538.68 1350.5,4482.09 1375,4457.59 XP2.C7@1375,4450.01
unused4: U1.L20
VREF: C31.1 R26.2 U15.14 U16.6 VREF.1 | length 621.8
  Top Layer w11: v1@2470.47,5577.17 U15.14@2534.45,5577.17
  Top Layer w20: U16.6@2504.07,5313 2573.43,5313 v2(2618.11,5357.68)
  Mid-Layer 5 w20: v1(2470.47,5574.22) 2550.39,5494.3 2550.39,5425.4 v2(2618.11,5357.68)
  Bottom Layer w18: v1(2470.47,5574.22) 2470.47,5534.85 2480.32,5525.01 C31.1@2515.75,5525.01 ; R26.2@2564.96,5347.84 2604.33,5347.84 2616.14,5359.65 v2(2618.11,5357.68)
VTBOT: R25.1 U19.1 | length 2395.6
  Mid-Layer 1 w5: v1(1614.17,4176.58) 1614.17,4238.29 1595.17,4257.29 1595.17,4319.39 1599.5,4323.72 1599.5,4811.51 1969.19,5181.2 2223.04,5181.2 2312.99,5271.15 2312.99,5342.07 2328.61,5357.68 v1(2352.36,5357.68)
  Mid-Layer 2 w6: v1(1614.17,4176.58) 1929.13,4176.58 2007.87,4097.84 v1(2007.87,3896.07)
  Bottom Layer w10: U19.1@1994.09,3945.28 1994.09,3926.58 2007.87,3912.8 v1(2007.87,3896.07)
  Bottom Layer w18: R25.1@2309.06,5347.84 2342.52,5347.84 v1(2352.36,5357.68)
VTbot_adc: C27.1 R25.2 U15.8 | length 525
  Top Layer w11: v1(2145.67,5538.22) 2201.21,5538.22 2214.57,5551.58 U15.8@2268.7,5551.58
  Mid-Layer 4 w11.81: v1(2145.67,5538.22) 2145.67,5389.18 v1(2181.1,5357.68)
  Bottom Layer w12: C27.1@2037.4,5564.38 2119.51,5564.38 v1(2145.67,5538.22)
  Bottom Layer w18: v1(2181.1,5357.68) 2190.94,5347.84 R25.2@2257.87,5347.84
VTTOP: R24.1 U18.1 | length 2473.1
  Top Layer w10: v1(1978.35,4058.47) 1994.09,4042.72 U18.1@1994.09,4019.1
  Mid-Layer 1 w5: v1(1466.54,4235.64) 1477.53,4224.65 1525.59,4224.65 1549.5,4248.55 1549.5,4788.38 1961.32,5200.2 2201.14,5200.2 2293.31,5292.37 2293.31,5357.68 v1(2352.36,5416.74)
  Mid-Layer 2 w6: v1(1466.54,4235.64) 1466.54,4147.05 1513.96,4099.62 1937.19,4099.62 v1(1978.35,4058.47)
  Bottom Layer w18: R24.1@2309.06,5436.42 2332.68,5436.42 v1(2352.36,5416.74)
VTtop_adc: C26.1 R24.2 U15.7 | length 381.8
  Top Layer w11: v1(2185.04,5564.38) 2197.83,5577.17 U15.7@2268.7,5577.17
  Mid-Layer 5 w11.81: v1(2185.04,5446.27) 2185.04,5463.08 2162.13,5485.99 2162.13,5521.79 2185.04,5544.69 v1(2185.04,5564.38)
  Bottom Layer w18: v1(2185.04,5446.27) 2194.88,5436.42 R24.2@2257.87,5436.42 ; v1(2185.04,5564.38) 2194.88,5554.53 C26.1@2259.84,5554.53
x1_en: R81.2 X1.1 | length 100.3
  Top Layer w8: X1.1@3927.95,5696.27 3927.95,5742.33 v1(3929.13,5743.51)
  Bottom Layer w11.81: R81.2@3911.42,5788.79 3929.13,5771.07 v1(3929.13,5743.51)
x3_en: R82.2 X3.1 | length 161.7
  Top Layer w15: X3.1@3533.46,5761.23 v1(3622.05,5761.23)
  Bottom Layer w15: R82.2@3602.36,5696.27 3602.36,5741.54 v1(3622.05,5761.23)
XP1A_3: U1.U24 XP1.A3 | length 1777.5
  Mid-Layer 2 w5: XP1.A3@675,4125.01 700.5,4099.51 1179.44,4099.51 1259.66,4019.29 1938.79,4019.29 1978.35,3979.73 1978.35,3822.25 1988.03,3812.57 1988.03,3625.22 v1(1968.51,3605.7)
  Bottom Layer w6: v1(1968.51,3605.7) U1.U24@1988.19,3586.02
XP1A_4: U1.W22 XP1.A4 | length 1520
  Mid-Layer 7 w5: XP1.A4@675,4075.01 700.5,4049.51 835.15,4049.51 875.69,4008.97 875.69,3923.62 1253.34,3545.97 1448.12,3545.97 1448.62,3546.47 1870.27,3546.47 v1(1889.78,3526.97)
  Bottom Layer w6: v1(1889.78,3526.97) U1.W22@1909.45,3507.29
XP1A_5: U1.Y22 XP1.A5 | length 1612
  Mid-Layer 5 w5: XP1.A5@675,4025.01 699.5,4049.51 1153.67,4049.51 1312.03,3891.15 1624.02,3891.15 1633.86,3881.3 1633.86,3715.94 1645.84,3703.96 1819.1,3703.96 1830.89,3692.18 1830.89,3546.48 v1(1850.39,3526.97)
  Bottom Layer w6: v1(1850.39,3526.97) U1.Y22@1870.08,3507.29
XP1A_6: U1.AG28 XP1.A6 | length 1036.5
  Mid-Layer 5 w5: XP1.A6@675,3973.82 XP1.A6@675.59,3974.41 ; XP1.A6@675,3975.01 699.5,3999.51 835.15,3999.51 845.77,3988.89 1135.04,3988.89 1341.04,3782.88 1555.13,3782.88 v1(1574.82,3763.19)
  Bottom Layer w6: v1(1574.82,3763.19) U1.AG28@1594.49,3743.51
XP1A_7: U1.AH27 XP1.A7 | length 993.2
  Mid-Layer 5 w5: XP1.A7@675,3923.82 XP1.A7@675.59,3924.41 ; XP1.A7@675,3925.01 700,3950.01 1104.51,3950.01 1311.01,3743.51 1515.75,3743.51 v1(1535.44,3723.82)
  Bottom Layer w6: v1(1535.44,3723.82) U1.AH27@1555.12,3704.14
XP1A_8: U1.AG26 XP1.A8 | length 1027.7
  Mid-Layer 5 w5: XP1.A8@675,3873.82 XP1.A8@675.59,3874.41 ; XP1.A8@675,3875.01 699.5,3899.51 1094,3899.51 1289.37,3704.14 1555.12,3704.14 v1(1574.81,3684.45)
  Bottom Layer w6: v1(1574.81,3684.45) U1.AG26@1594.49,3664.77
XP1A_9: U1.AA22 XP1.A9 | length 1371.1
  Mid-Layer 5 w5: XP1.A9@675,3823.82 XP1.A9@675.59,3824.41 ; XP1.A9@675,3825.01 700,3850.01 1090.37,3850.01 1275.79,3664.58 1476.37,3664.58 1779.74,3664.58 1791.52,3652.8 1791.52,3549.01 1811.03,3529.5 v1(1811.03,3526.97)
  Bottom Layer w6: v1(1811.03,3526.97) U1.AA22@1830.71,3507.29
XP1A_10: U1.W21 XP1.A10 | length 1438.6
  Mid-Layer 5 w5: XP1.A10@675,3773.82 XP1.A10@675.59,3774.41 ; XP1.A10@675,3775.01 700,3800.01 1077.85,3800.01 1252.6,3625.26 1722.44,3625.26 1722.5,3625.2 1740.37,3625.2 1752.16,3613.41 1752.16,3518.89 1763.95,3507.1 1870.28,3507.1 v1(1889.78,3487.6)
  Bottom Layer w6: v1(1889.78,3487.6) U1.W21@1909.45,3467.92
XP1A_11: U1.AC22 XP1.A11 | length 1167.2
  Mid-Layer 5 w5: XP1.A11@675,3725.01 700,3700.01 1024.79,3700.01 1177.96,3546.83 1709.9,3546.83 1729.76,3526.97 v1(1732.29,3526.97)
  Bottom Layer w6: v1(1732.29,3526.97) U1.AC22@1751.98,3507.28
XP1A_12: U1.AC21 XP1.A12 | length 1164.5
  Mid-Layer 5 w5: XP1.A12@675,3675.01 699.5,3650.51 952.71,3650.51 953.24,3651.04 1007.82,3651.04 1153.36,3505.51 1226.58,3505.51 1228.18,3507.1 1712.79,3507.1 v1(1732.29,3487.6)
  Bottom Layer w6: v1(1732.29,3487.6) U1.AC21@1751.98,3467.92
XP1A_13: U1.AB21 XP1.A13 | length 1200.1
  Mid-Layer 5 w5: XP1.A13@675,3625.01 700,3600.01 991.91,3600.01 1123.82,3468.09 1752.15,3468.09 v1(1771.66,3487.6) v1@1769.13,3487.6
  Bottom Layer w6: v1(1771.66,3487.6) U1.AB21@1791.34,3467.92
XP1A_14: U1.AC19 XP1.A14 | length 1154
  Mid-Layer 5 w5: XP1.A14@675,3575.01 700,3550.01 998.64,3550.01 1119.96,3428.69 1712.46,3428.69 v1(1732.3,3408.84)
  Bottom Layer w6: v1(1732.3,3408.84) U1.AC19@1751.98,3389.17
XP1A_15: U1.AB19 XP1.A15 | length 1188.8
  Mid-Layer 5 w5: XP1.A15@675,3525.01 700,3500.01 993.49,3500.01 1104.16,3389.34 1752.16,3389.34 v1(1771.67,3408.84)
  Bottom Layer w6: v1(1771.67,3408.84) U1.AB19@1791.34,3389.18
XP1A_16: U1.AB18 XP1.A16 | length 1184.4
  Mid-Layer 5 w5: XP1.A16@675,3475.01 700,3450.01 982.48,3450.01 1082.51,3349.98 1752.15,3349.98 v1(1771.66,3369.48)
  Bottom Layer w6: v1(1771.66,3369.48) U1.AB18@1791.34,3349.81
XP1A_17: U1.Y12 XP1.A17 | length 1481.2
  Mid-Layer 4 w5: XP1.A17@675,3425.01 700,3450.01 875.98,3450.01 1054.92,3271.07 1850.39,3271.07 1870.08,3251.38 1870.08,3182.67 1869.89,3182.49 1869.89,3113.4 v1(1850.39,3093.9)
  Bottom Layer w6: v1(1850.39,3093.9) U1.Y12@1870.08,3113.59
XP1A_18: U1.AA17 XP1.A18 | length 1198.8
  Mid-Layer 5 w5: XP1.A18@675,3375.01 700,3350.01 1023.42,3350.01 1062.99,3310.44 1791.35,3310.44 v1(1811.03,3330.12)
  Bottom Layer w6: v1(1811.03,3330.12) U1.AA17@1830.71,3310.44
XP1A_19: U1.Y17 XP1.A19 | length 1283.6
  Mid-Layer 7 w5: XP1.A19@675,3325.01 700,3300.01 875.98,3300.01 924.61,3251.38 1801.18,3251.38 1830.89,3281.1 1830.89,3310.62 v1(1850.39,3330.12)
  Bottom Layer w6: v1(1850.39,3330.12) U1.Y17@1870.08,3310.44
XP1A_22: U1.W14 XP1.A22 | length 1392.1
  Mid-Layer 5 w5: XP1.A22@675,3173.82 XP1.A22@675.59,3174.41 ; XP1.A22@675,3175.01 700,3200.01 885.61,3200.01 956.67,3271.07 1879.92,3271.07 1909.28,3241.71 1909.28,3192.56 1889.78,3173.06 v1(1889.78,3172.63)
  Bottom Layer w6: v1(1889.78,3172.63) U1.W14@1909.46,3192.32
XP1A_23: U1.Y15 XP1.A23 | length 1266.6
  Mid-Layer 5 w5: XP1.A23@675,3123.82 676.19,3125.01 XP1.A23@675,3125.01 700,3150.01 929.63,3150.01 1021.16,3241.54 1820.85,3241.54 v1(1850.39,3212)
  Bottom Layer w6: v1(1850.39,3212) U1.Y15@1870.08,3231.7
XP1A_24: U1.AC14 XP1.A24 | length 1142.6
  Mid-Layer 5 w5: XP1.A24@675,3073.82 XP1.A24@675.59,3074.41 ; XP1.A24@675,3075.01 700,3100.01 941.14,3100.01 1033.28,3192.14 1712.78,3192.14 v1(1732.29,3172.63)
  Bottom Layer w6: v1(1732.29,3172.63) U1.AC14@1751.98,3192.32
XP1A_25: U1.AB14 XP1.A25 | length 1186.5
  Mid-Layer 5 w5: XP1.A25@675,3023.82 XP1.A25@675.59,3024.41 ; XP1.A25@675,3025.01 700,3050.01 967.42,3050.01 1070.2,3152.78 1751.81,3152.78 v1(1771.66,3172.63)
  Bottom Layer w6: v1(1771.66,3172.63) U1.AB14@1791.34,3192.32
XP1A_26: U1.AC12 XP1.A26 | length 1151.4
  Mid-Layer 5 w5: XP1.A26@675,2973.82 XP1.A26@675.59,2974.41 ; XP1.A26@675,2975.01 700,3000.01 990.73,3000.01 1104.13,3113.41 1712.79,3113.41 v1(1732.29,3093.9)
  Bottom Layer w6: v1(1732.29,3093.9) U1.AC12@1751.98,3113.58
XP1A_27: U1.AB12 XP1.A27 | length 1195.4
  Mid-Layer 5 w5: XP1.A27@675,2923.82 XP1.A27@675.59,2924.41 ; XP1.A27@675,2925.01 700,2950.01 1029.31,2950.01 1153.47,3074.16 1740.42,3074.16 1740.55,3074.04 1751.8,3074.04 v1(1771.66,3093.9)
  Bottom Layer w6: v1(1771.66,3093.9) U1.AB12@1791.34,3113.59
XP1A_28: U1.AC11 XP1.A28 | length 1162.4
  Mid-Layer 5 w5: XP1.A28@675,2873.82 676.19,2875.01 XP1.A28@675,2875.01 700,2900.01 1065.95,2900.01 1200.79,3034.85 1712.61,3034.85 v1(1732.29,3054.53)
  Bottom Layer w6: v1(1732.29,3054.53) U1.AC11@1751.98,3074.22
XP1A_29: U1.AD10 XP1.A29 | length 1127.4
  Mid-Layer 5 w5: XP1.A29@675,2823.82 676.18,2825.01 XP1.A29@675,2825.01 700,2850.01 1067.11,2850.01 1212.4,2995.3 1673.08,2995.3 v1(1692.93,3015.15)
  Bottom Layer w6: v1(1692.93,3015.15) U1.AD10@1712.6,3034.85
XP1A_30: U1.AD8 XP1.A30 | length 1132.9
  Mid-Layer 5 w5: XP1.A30@675,2775.01 699.5,2750.51 856.81,2750.51 865.37,2759.07 1141.55,2759.07 1299.04,2916.56 1673.07,2916.56 v1(1692.93,2936.42)
  Bottom Layer w6: v1(1692.93,2936.42) U1.AD8@1712.6,2956.11
XP1A_31: U1.AK5 XP1.A31 | length 851
  Bottom Layer w5: XP1.A31@675,2723.82 676.18,2725.01 XP1.A31@675,2725.01 700,2750.01 955.31,2750.01 1043.31,2838 U1.AK5@1476.38,2838
XP1A_32: U1.AG7 XP1.A32 | length 1039.8
  Mid-Layer 5 w5: XP1.A32@675,2673.82 698.82,2650.01 1089.59,2650.01 1316.95,2877.37 1555.13,2877.37 v1(1574.81,2897.05)
  Bottom Layer w6: v1(1574.81,2897.05) U1.AG7@1594.49,2916.74
XP1A_33: U1.AF9 XP1.A33 | length 1133
  Mid-Layer 4 w5: XP1.A33@675,2625.01 700,2600.01 1054.04,2600.01 1410.14,2956.11 1594.5,2956.11 v1(1614.18,2975.78)
  Bottom Layer w6: v1(1614.18,2975.78) U1.AF9@1633.86,2995.48
XP1A_34: U1.AD7 XP1.A34 | length 1189.2
  Mid-Layer 5 w5: XP1.A34@675,2573.82 XP1.A34@675.59,2574.41 ; XP1.A34@675,2575.01 700,2600.01 1093.21,2600.01 1331.39,2838.18 1622.25,2838.18 1634.06,2849.99 1634.06,2865.76 1645.48,2877.18 1673.06,2877.18 v1(1692.93,2897.05)
  Bottom Layer w6: v1(1692.93,2897.05) U1.AD7@1712.6,2916.74
XP1A_35: U1.AF6 XP1.A35 | length 1125.5
  Mid-Layer 4 w5: XP1.A35@675,2525.01 700,2500.01 866.73,2500.01 885.83,2519.1 1127.95,2519.1 1446.85,2838 1594.49,2838 v1(1614.18,2857.68)
  Bottom Layer w6: v1(1614.18,2857.68) U1.AF6@1633.86,2877.37
XP1A_36: U1.AC9 XP1.A36 | length 1367
  Mid-Layer 5 w5: XP1.A36@675,2473.82 676.19,2475.01 XP1.A36@675,2475.01 700,2500.01 852.95,2500.01 865.96,2513.01 1064.76,2513.01 1350.38,2798.63 1661.46,2798.63 1673.06,2810.22 1673.06,2826.04 1684.84,2837.81 1700.63,2837.81 1712.43,2849.61 1712.43,2955.92 v1(1732.29,2975.78)
  Bottom Layer w6: v1(1732.29,2975.78) U1.AC9@1751.98,2995.47
XP1A_37: U1.AG4 XP1.A37 | length 1075.4
  Mid-Layer 4 w5: XP1.A37@675,2423.82 XP1.A37@675,2425.01 700,2450.01 1149.39,2450.01 1458.64,2759.26 1555.13,2759.26 v1(1574.81,2778.93)
  Bottom Layer w6: v1(1574.81,2778.93) U1.AG4@1594.49,2798.62
XP1A_38: U1.AD3 XP1.A38 | length 1196.8
  Mid-Layer 5 w5: XP1.A38@675,2375.01 699.5,2399.51 1098.89,2399.51 1419.27,2719.89 1673.23,2719.89 v1(1692.91,2739.57)
  Bottom Layer w6: v1(1692.91,2739.57) U1.AD3@1712.6,2759.26
XP1B_3: U1.AG29 XP1.B3 | length 1138.1
  Bottom Layer w5: XP1.B3@725,4125.01 750,4100.01 1493.9,4100.01 1574.8,4019.1 1574.8,3802.56
  Bottom Layer w6: 1574.8,3802.56 U1.AG29@1594.49,3782.88
XP1B_4: U1.U25 XP1.B4 | length 1622.4
  Mid-Layer 2 w5: XP1.B4@725,4075.01 750.5,4049.51 1155.43,4049.51 1215.55,3989.39 1919.48,3989.39 1948.66,3960.2 1948.66,3664.92 v1(1968.51,3645.07)
  Bottom Layer w6: v1(1968.51,3645.07) U1.U25@1988.19,3625.4
XP1B_5: U1.AH26 XP1.B5 | length 1000.5
  Mid-Layer 1 w5: XP1.B5@725,4023.82 751.19,4050.01 1073.41,4050.01 1419.27,3704.14 1515.75,3704.14 v1(1535.44,3684.45)
  Bottom Layer w6: v1(1535.44,3684.45) U1.AH26@1555.12,3664.77
XP1B_6: U1.V26 XP1.B6 | length 1495.2
  Mid-Layer 2 w5: XP1.B6@725,3973.82 XP1.B6@725.59,3974.41 ; XP1.B6@725,3975.01 750,4000.01 864.91,4000.01 865.23,4000.32 925.38,3940.17 1880.11,3940.17 1909.29,3910.99 1909.29,3704.3 v1(1929.14,3684.45)
  Bottom Layer w6: v1(1929.14,3684.45) U1.V26@1948.82,3664.77
XP1B_7: U1.W25 XP1.B7 | length 1457
  Mid-Layer 2 w5: XP1.B7@725,3925.01 750,3950.01 874.98,3950.01 924,3900.99 1850.39,3900.99 1869.91,3881.47 1869.91,3664.94 v1(1889.78,3645.07)
  Mid-Layer 2 w5.88: XP1.B7@725,3923.82 XP1.B7@725.59,3924.41
  Bottom Layer w6: v1(1889.78,3645.07) U1.W25@1909.45,3625.4
XP1B_8: U1.Y25 XP1.B8 | length 1379.6
  Mid-Layer 2 w5: XP1.B8@725,3873.82 XP1.B8@725.59,3874.41 ; XP1.B8@725,3875.01 750,3900.01 873.3,3900.01 911.69,3861.62 1820.87,3861.62 1830.54,3851.94 1830.54,3664.92 v1(1850.39,3645.07)
  Bottom Layer w6: v1(1850.39,3645.07) U1.Y25@1870.08,3625.4
XP1B_9: U1.W20 XP1.B9 | length 1514.9
  Mid-Layer 2 w5: XP1.B9@725,3825.01 749.5,3800.51 1485.82,3800.51 1503.63,3782.69 1781.86,3782.69 1791.52,3773.04 1791.52,3595.69 1801.01,3586.2 1858.1,3586.2 1869.89,3574.41 1869.89,3468.08 v1(1889.78,3448.19)
  Bottom Layer w6: v1(1889.78,3448.19) U1.W20@1909.46,3428.52
XP1B_10: U1.AA21 XP1.B10 | length 1240.9
  Mid-Layer 7 w5: XP1.B10@725,3775.01 750,3750.01 948.23,3750.01 1200.79,3497.45 1222.42,3497.45 1232.08,3507.1 1791.52,3507.1 v1(1811.03,3487.6)
  Bottom Layer w6: v1(1811.03,3487.6) U1.AA21@1830.71,3467.92
XP1B_11: U1.AB23 XP1.B11 | length 1247.1
  Mid-Layer 2 w5: XP1.B11@725,3723.82 XP1.B11@725.59,3724.41 ; XP1.B11@725,3725.01 750,3750.01 892.13,3750.01 898.62,3743.51 1740.18,3743.51 1752.15,3731.54 1752.15,3585.84 v1(1771.66,3566.33)
  Bottom Layer w6: v1(1771.66,3566.33) U1.AB23@1791.34,3546.66
XP1B_12: U1.AC24 XP1.B12 | length 1127.9
  Mid-Layer 2 w5: XP1.B12@725,3673.82 XP1.B12@725.59,3674.41 ; XP1.B12@725,3675.01 750,3700.01 895.67,3700.01 899.62,3703.95 1701,3703.95 1712.43,3692.53 1712.43,3625.57 v1(1732.29,3605.7)
  Bottom Layer w6: v1(1732.29,3605.7) U1.AC24@1751.98,3586.02
XP1B_13: U1.Y21 XP1.B13 | length 1226.5
  Mid-Layer 7 w5: XP1.B13@725,3625.01 750,3600.01 989.96,3600.01 1122.05,3467.92 1830.71,3467.92 v1(1850.39,3487.6)
  Bottom Layer w6: v1(1850.39,3487.6) U1.Y21@1870.08,3467.92
XP1B_14: U1.AD24 XP1.B14 | length 1077.3
  Mid-Layer 2 w5: XP1.B14@725,3573.82 XP1.B14@725.59,3574.41 ; XP1.B14@725,3575.01 750,3600.01 912.11,3600.01 977.05,3664.95 1665.66,3664.95 1673.23,3657.39 1673.23,3635.41 1673.06,3635.24 1673.06,3625.57 v1(1692.93,3605.7)
  Bottom Layer w6: v1(1692.93,3605.7) U1.AD24@1712.61,3586.02
XP1B_15: U1.AE24 XP1.B15 | length 1006.8
  Mid-Layer 2 w5: XP1.B15@725,3523.82 XP1.B15@725.59,3524.41 ; XP1.B15@725,3525.01 750,3550.01 916.24,3550.01 991.46,3625.22 1631.51,3625.22 1651.03,3605.7 v1(1653.56,3605.7)
  Bottom Layer w6: v1(1653.56,3605.7) U1.AE24@1673.24,3586.02
XP1B_16: U1.AC23 XP1.B16 | length 1090
  Mid-Layer 2 w5: XP1.B16@725,3473.82 XP1.B16@725.59,3474.41 ; XP1.B16@725,3475.01 750,3500.01 930.22,3500.01 1016.05,3585.84 1712.79,3585.84 v1(1732.29,3566.33)
  Bottom Layer w6: v1(1732.29,3566.33) U1.AC23@1751.98,3546.65
XP1B_17: U1.AD22 XP1.B17 | length 1074.5
  Mid-Layer 2 w5: XP1.B17@725,3425.01 749.5,3400.51 889.77,3400.51 1031.19,3541.92 1066.15,3541.92 1070.7,3546.47 1673.42,3546.47 v1(1692.93,3526.97)
  Bottom Layer w6: v1(1692.93,3526.97) U1.AD22@1712.6,3507.29
XP1B_18: U1.Y20 XP1.B18 | length 1268.8
  Mid-Layer 2 w5: XP1.B18@725,3375.01 749.5,3350.51 893.91,3350.51 1048.91,3505.51 1226.58,3505.51 1228.18,3507.1 1819.1,3507.1 1830.53,3495.68 1830.53,3468.07 v1(1850.4,3448.19)
  Bottom Layer w6: v1(1850.4,3448.19) U1.Y20@1870.08,3428.52
XP1B_19: U1.AD20 XP1.B19 | length 1083.3
  Mid-Layer 2 w5: XP1.B19@725,3325.01 749.5,3300.51 897.53,3300.51 1064.77,3467.74 1673.39,3467.74 v1(1692.93,3448.19)
  Bottom Layer w6: v1(1692.93,3448.19) U1.AD20@1712.61,3428.52
XP1B_22: U1.W19 XP1.B22 | length 1305.6
  Mid-Layer 2 w5: XP1.B22@725,3175.01 750,3200.01 885.61,3200.01 1113.97,3428.36 1870.26,3428.36 v1(1889.78,3408.84)
  Bottom Layer w6: v1(1889.78,3408.84) U1.W19@1909.45,3389.18
XP1B_23: U1.AD19 XP1.B23 | length 1134
  Mid-Layer 2 w5: XP1.B23@725,3125.01 750,3100.01 854.51,3100.01 1143.51,3389 1673.09,3389 v1(1692.93,3408.84)
  Bottom Layer w6: v1(1692.93,3408.84) U1.AD19@1712.6,3389.18
XP1B_24: U1.AD18 XP1.B24 | length 1138.5
  Mid-Layer 2 w5: XP1.B24@725,3075.01 750,3050.01 881.3,3050.01 1130.11,3298.81 1180.9,3349.63 1673.07,3349.63 v1(1692.93,3369.48)
  Bottom Layer w6: v1(1692.93,3369.48) U1.AD18@1712.6,3349.81
XP1B_25: U1.AB17 XP1.B25 | length 1221.6
  Mid-Layer 2 w5: XP1.B25@725,3025.01 750,3000.01 905.12,3000.01 1215.37,3310.26 1751.8,3310.26 v1(1771.66,3330.12)
  Bottom Layer w6: v1(1771.66,3330.12) U1.AB17@1791.34,3310.44
XP1B_26: U1.AF13 XP1.B26 | length 982.6
  Mid-Layer 4 w5: XP1.B26@725,2975.01 750,3000.01 939.57,3000.01 1053.15,3113.59 1594.5,3113.59 v1(1614.18,3133.27)
  Bottom Layer w6: v1(1614.18,3133.27) U1.AF13@1633.86,3152.96
XP1B_27: U1.Y16 XP1.B27 | length 1325
  Mid-Layer 2 w5: XP1.B27@725,2925.01 749.5,2900.51 876.98,2900.51 1247.54,3271.07 1830.71,3271.07 v1(1850.39,3290.75)
  Bottom Layer w6: v1(1850.39,3290.75) U1.Y16@1870.08,3271.07
XP1B_28: U1.AA15 XP1.B28 | length 1394.7
  Mid-Layer 2 w5: XP1.B28@725,2875.01 750,2850.01 1025.79,2850.01 1092.33,2916.55 1092.33,3066.65 1277.06,3251.37 1771.65,3251.37 v1(1811.03,3212)
  Bottom Layer w6: v1(1811.03,3212) U1.AA15@1830.71,3231.7
XP1B_29: U1.AC15 XP1.B29 | length 1319.6
  Mid-Layer 2 w5: XP1.B29@725,2825.01 725,2823.83 748.82,2800.01 1026.95,2800.01 1126.97,2900.02 1126.97,3047.66 1310.94,3231.63 1712.66,3231.63 v1(1732.29,3212)
  Bottom Layer w6: v1(1732.29,3212) U1.AC15@1751.98,3231.68
XP1B_30: U1.AD15 XP1.B30 | length 1292.7
  Mid-Layer 2 w5: XP1.B30@725,2775.01 725,2773.83 748.82,2750.01 1055.69,2750.01 1161.42,2855.73 1161.42,3017.11 1336.45,3192.14 1673.07,3192.14 v1(1692.93,3212)
  Bottom Layer w6: v1(1692.93,3212) U1.AD15@1712.6,3231.7
XP1B_31: U1.AD14 XP1.B31 | length 1311.7
  Mid-Layer 2 w5: XP1.B31@725,2725.01 750,2700.01 1075.1,2700.01 1203.25,2828.16 1203.25,3015.67 1340.36,3152.78 1673.07,3152.78 v1(1692.93,3172.63)
  Bottom Layer w6: v1(1692.93,3172.63) U1.AD14@1712.61,3192.32
XP1B_32: U1.Y13 XP1.B32 | length 1472.2
  Mid-Layer 2 w5: XP1.B32@725,2675.01 750,2650.01 1089.59,2650.01 1269.5,2829.92 1269.5,3014.98 1367.93,3113.41 1830.53,3113.41 v1(1850.39,3133.27)
  Bottom Layer w6: v1(1850.39,3133.27) U1.Y13@1870.08,3152.96
XP1B_33: U1.AD12 XP1.B33 | length 1326
  Mid-Layer 2 w5: XP1.B33@725,2625.01 750,2600.01 1093.21,2600.01 1301.67,2808.47 1301.67,3005.32 1370.39,3074.04 1673.07,3074.04 v1(1692.93,3093.9)
  Bottom Layer w6: v1(1692.93,3093.9) U1.AD12@1712.6,3113.59
XP1B_34: U1.AD11 XP1.B34 | length 1336.2
  Mid-Layer 2 w5: XP1.B34@725,2575.01 750,2550.01 1101.75,2550.01 1331.2,2779.45 1331.2,2986.15 1379.72,3034.66 1395.87,3034.66 1673.06,3034.66 v1(1692.93,3054.53)
  Bottom Layer w6: v1(1692.93,3054.53) U1.AD11@1712.6,3074.22
XP1B_35: U1.W9 XP1.B35 | length 1563.6
  Mid-Layer 2 w5: XP1.B35@725,2525.01 725,2523.83 748.82,2500.01 848.03,2500.01 861.22,2513.19 1153.53,2513.19 1368.3,2727.96 1368.3,2978.44 1385.16,2995.3 1870.26,2995.3 v1(1889.78,2975.78)
  Bottom Layer w6: v1(1889.78,2975.78) U1.W9@1909.45,2995.48